# Altium PCB Antenna.PcbDoc
Units mm, origin at the board's own origin, x right, y up, seen from the top; angles counter-clockwise.
Board outline 60.1 x 23.46 mm, 2 copper layers (Top, Bottom); 54 components, 59 nets, 240 pads, 121 vias.
Unrouted connection lines stored in the file: 4.
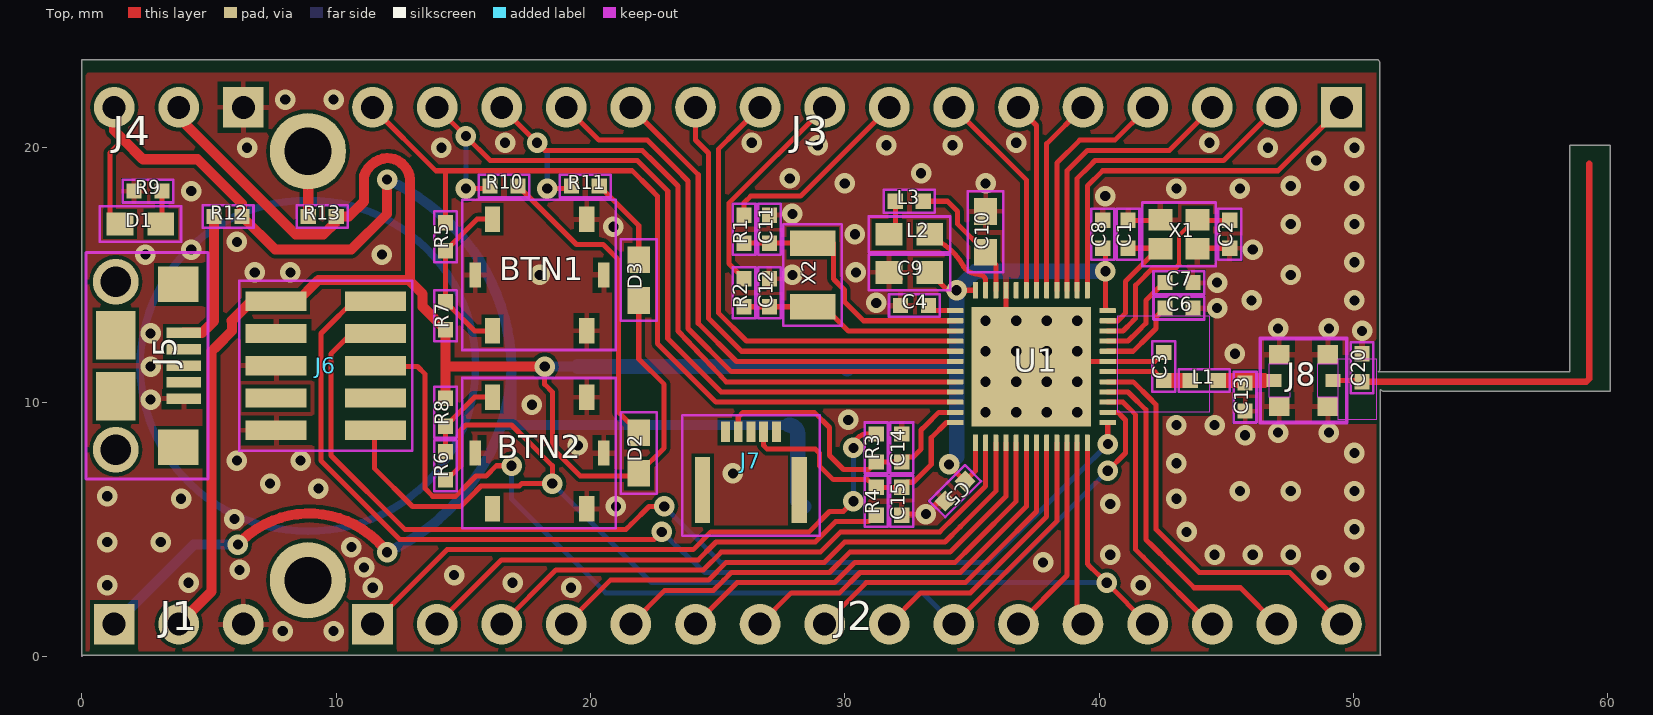
[diagram p0: Top view]
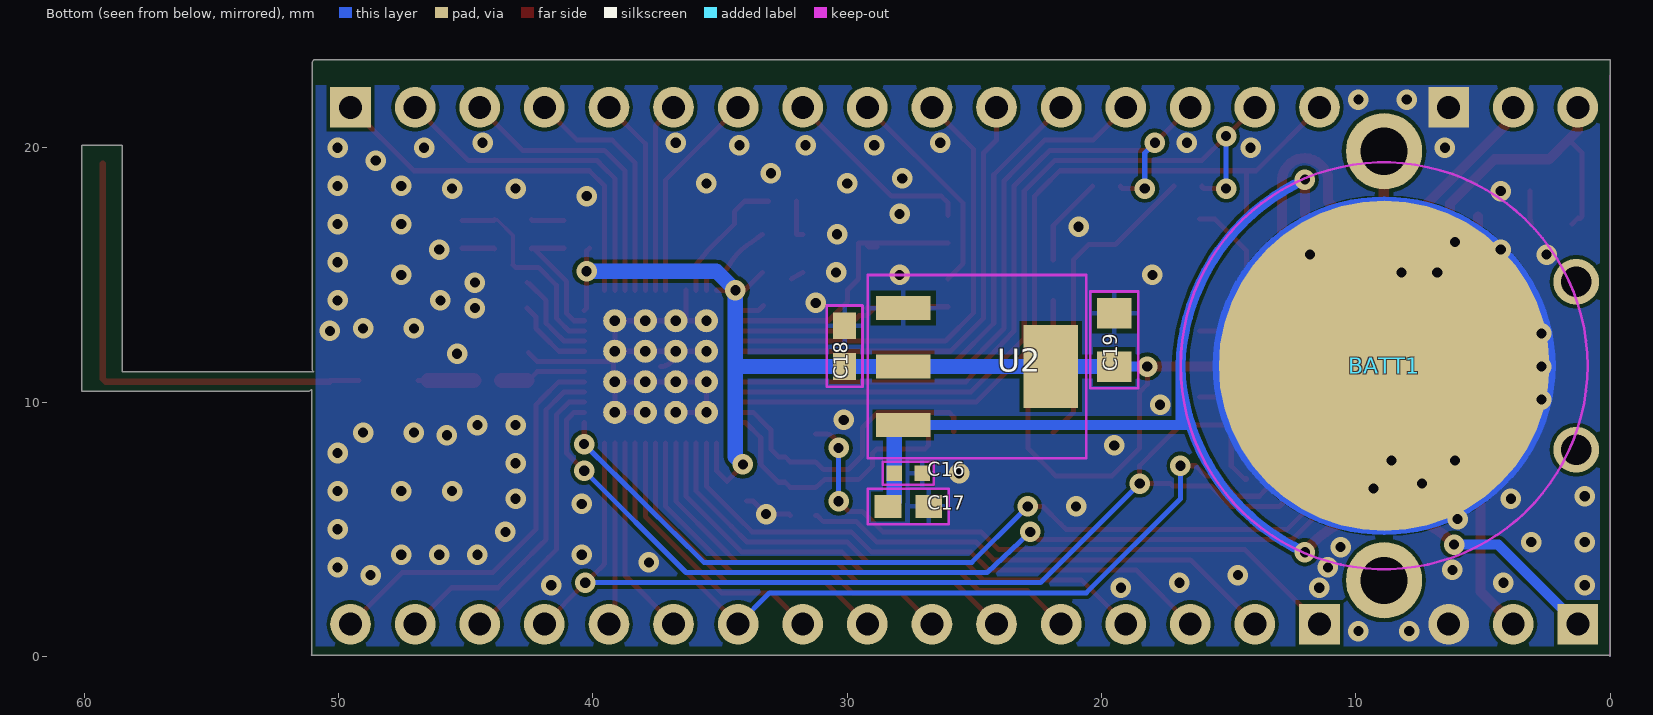
[diagram p1: Bottom view, seen from below]

## Layer stack, top to bottom
Top Solder: solder mask 0.0102, Solder Resist, Dk 3.5
Top: signal copper 0.035
Dielectric 1: dielectric 0.32, FR-4, Dk 4.8
Bottom: signal copper 0.035
Bottom Solder: solder mask 0.0102, Solder Resist, Dk 3.5

## Board outline
0,0 0,23.46 50.965,23.46 51.046,23.378 51.046,11.263 50.987,11.203 58.51,11.203 58.51,20.101 60.097,20.101 60.097,10.435 51.159,10.435 51.059,10.485 51.059,0.069 51.078,0.05 0.05,0.05

## Design rules (kind name [scope] priority, off if disabled: settings)
BoardOutlineClearance mdCopperDimension [All] p1: gap=0.254 ignorepadtopadclearanceinfootprint=FALSE except(0: Arc-SplitContinuation Track-SplitContinuation SMDPad-SplitContinuation THPad-SplitContinuation Via-SplitContinuation Fill-SplitContinuation Poly-SplitContinuation Region-SplitContinuation Text-SplitContinuation; 0.4: Poly-OutlineEdge Poly-CavityEdge Poly-CutoutEdge Poly-SplitBarrior)
Clearance "Clearance (Same Net)" [All] p1: gap=0.15 ignorepadtopadclearanceinfootprint=FALSE
Clearance [All] p2: gap=0.15 ignorepadtopadclearanceinfootprint=FALSE
HoleSize [All] p1: absolutevalues=TRUE maxlimit=2540 minlimit=0.4 maxpercent=80.000 minpercent=20.000
HoleToHoleClearance mdDrill [All] p1: gap=0.4 allowstackedmicrovias=TRUE
MinimumSolderMaskSliver [All] p1 off: minsoldermaskwidth=0.254
PasteMaskExpansion Expansion_SMDPaste_OFF [InPadClass('SMDPaste_OFF')] p1: expansion=0
PasteMaskExpansion mlMinCreamFrame [All] p2: expansion=0
PolygonConnect PolygonConnect_For_PolygonThermal_ON_Width78700_Gap78740 [InPolygonClass('PolygonThermal_ON_Width78700_Gap78740') vs Not IsVia] p1: connectstyle=Relief reliefconductorwidth=0.2 reliefentries=4 polygonreliefangle="90 Angle" airgapwidth=0.2
PolygonConnect ThermalVias [IsVia] p2: connectstyle=Direct reliefconductorwidth=0.254 reliefentries=4 polygonreliefangle="90 Angle" airgapwidth=0.254
PolygonConnect [All] p3: connectstyle=Relief reliefconductorwidth=0.254 reliefentries=4 polygonreliefangle="90 Angle" airgapwidth=0.254
RoutingVias [All] p1: holewidth=0.4 width=0.806 viastyle="Through Hole" minholewidth=0.4 minwidth=0.806 maxholewidth=2.54 maxwidth=2.54
SolderMaskExpansion Expansion_SMDSolder_OFF [InPadClass('SMDSolder_OFF')] p1: expansion=0 istentingtop=FALSE
SolderMaskExpansion mlMinStopFrame [All] p2: expansion=0.1 istentingtop=FALSE
Width [All] p1: maxlimit=0.254 minlimit=0.15 preferedwidth=0.15
26 further rules are at their usual default settings.

## Classes and differential pairs
polygon class PolygonThermal_ON_Width78700_Gap78740: Polygon_1_Net_GND Polygon_2_Net_GND

## Components (designator, comment, footprint, x,y, rotation, side; value= is the part's Value field where it differs from the comment)
BATT1 "" CR1632_HOLDER_TH 8.89,11.43 r270 bottom
BTN1 "PANASONIC_EVQPT5A15" PANASONIC_EVQPT5A15 18,15 r0 top
BTN2 "PANASONIC_EVQPT5A15" PANASONIC_EVQPT5A15 18,8 r0 top
C1 "12pF" RESC0402_N 41.14,16.6 r90 top
C2 "12pF" RESC0402_N 45.14,16.6 r270 top
C3 "0.8pF" RESC0402_N 42.54,11.4 r90 top
C4 "100nF" RESC0402_N 32.74,13.8 r180 top
C5 "100nF" RESC0402_N 34.34,6.5 r225 top
C6 "N.M." RESC0402_N 43.14,13.7 r0 top
C7 "100nF" RESC0402_N 43.14,14.7 r0 top
C8 "100nF" RESC0402_N 40.14,16.6 r90 top
C9 "4.7µF" RESC0603_N 32.54,15.1 r180 top
C10 "1.0µF" RESC0603_N 35.54,16.7 r90 top
C11 "12pF" RESC0402_N 27.04,16.8 r270 top
C12 "12pF" RESC0402_N 27.04,14.3 r270 top
C13 "N.C." RESC0402_N 45.74,10.2 r270 top
C14 "300pF" RESC0402_N 32.24,8.2 r270 top
C15 "300pF" RESC0402_N 32.24,6.1 r270 top
C16 "100nF" RESC0402_N 27.6,7.2 r180 bottom
C17 "10µF" RESC0603_N 27.6,5.9 r180 bottom
C18 "10µF" RESC0603_N 30.1,12.2 r90 bottom
C19 "100µF" RESC0805_N 19.5,12.5 r90 bottom
C20 "TBD" RESC0402_N 50.34,11.35 r90 top
D1 "LED" DIOC0603_N 2.3,17 r0 top
D2 "LED" DIOC0603_N 21.9,8 r270 top
D3 "LED" DIOC0603_N 21.9,14.8 r270 top
J1 "" HDRV3W64P254_1X3_762X254X900B_NO_SILK 3.81,1.27 r0 top
J2 "" HDRV16W64P254_1X16_4064X254X900B_NO_SILK 30.48,1.27 r0 top
J3 "" HDRV16W64P254_1X16_4064X254X900B_NO_SILK 30.48,21.59 r180 top
J4 "" HDRV3W64P254_1X3_762X254X900B_NO_SILK 3.81,21.59 r180 top
J5 "MICROUSB" USB-MICRO-B-RA-SMD-PIP 4.01,11.43 r0 top
J6 "" HDRV127P5X2-10_N 9.59,11.43 r270 top
J7 "" FPC_05P-RA-SMD 26.31,7.24 r0 top
J8 "MM8130-2600" MM8130-2600 48.04,10.85 r90 top
L1 "3.9nH" RESC0402_N 44.14,10.85 r0 top
L2 "10µH" RESC0603_N 32.54,16.6 r180 top
L3 "15nH" RESC0402_N 32.54,17.9 r0 top
R1 "0R" RESC0402_N 26.04,16.8 r90 top
R2 "0R" RESC0402_N 26.04,14.3 r270 top
R3 "0R" RESC0402_N 31.24,8.2 r90 top
R4 "0R" RESC0402_N 31.24,6.1 r90 top
R5 "330R" RESC0402_N 14.3,16.5 r270 top
R6 "330R" RESC0402_N 14.3,7.5 r90 top
R7 "100k" RESC0402_N 14.3,13.4 r270 top
R8 "100k" RESC0402_N 14.3,9.6 r90 top
R9 "330R" RESC0402_N 2.6,18.3 r0 top
R10 "330R" RESC0402_N 16.6,18.5 r0 top
R11 "330R" RESC0402_N 19.8,18.5 r0 top
R12 "0R" RESC0402_N 5.75,17.3 r0 top
R13 "0R" RESC0402_N 9.45,17.3 r0 top
U1 "NRF52832" QFN40P600X600X90-48_N 37.34,11.4 r0 top
U2 "TLV1117" SOT220P700-4_N 24.9,11.4 r180 bottom
X1 "32MHz" BT-XTAL_2016_N 43.14,16.6 r180 top
X2 "32.768kHz" XTAL_3215_N 28.74,15 r270 top

## Footprints (in the part's own frame and the unit in brackets; to place one, negate y for a bottom-side part, rotate by r counter-clockwise, add the part's x,y. Pads: shape width x height; smd on the part's side, far side on the other; paste and mask are expansions set on the pad)
BT-XTAL_2016_N [mm] "BT-XTAL_2016_N"
  rect 0.95x0.85 smd: 1(-0.725,-0.575) 2(0.725,-0.575) 3(0.725,0.575) 4(-0.725,0.575)
  Top keep-out lines w0.1: 1.45,1.25 -1.45,1.25 -1.45,-1.25 1.45,-1.25 1.45,1.25
  body extent -1.5,-1.3 1.5,1.3, height 3.81
CR1632_HOLDER_TH [mm] "CR1632_HOLDER_TH"
  rrect100% 13x13 smd: 1(0,0)
  round 3 hole 1.85: 2(-8.435,0) 3(8.435,0)
  Top keep-out circle w0.1: c0,0 r8
  body extent -9.94,-8.06 9.94,8.06, height 3.81
DIOC0603_N [mil] "DIOC0603_N"
  rect 41.34x35.43 smd: 1(-31.5,0) 2(31.5,0)
  Top keep-out lines w3.94: -62.99,-27.56 62.99,-27.56 62.99,27.56 -62.99,27.56 -62.99,-27.56
  body extent -65,-30 65,30, height 150
FPC_05P-RA-SMD [mm] "FPC_05P-RA-SMD"
  rect 0.6x2.6 smd: 0(-1.9,-0.7) 00(1.9,-0.7)
  rect 0.35x0.8 smd: 1(-1,1.6) 2(-0.5,1.6) 3(0,1.6) 4(0.5,1.6) 5(1,1.6)
  Top keep-out lines w0.1: -2.7,-2.5 -2.7,2.25 2.7,2.25 2.7,-2.5 -2.7,-2.5
  body extent -2.75,-2.55 2.75,2.3, height 3.81
HDRV3W64P254_1X3_762X254X900B_NO_SILK [mm] "HDRV3W64P254_1X3_762X254X900B_NO_SILK"
  rect 1.6x1.6 / inner round 1.478 / far side rect 1.6x1.6 hole 0.9: P$1(-2.54,0)
  round 1.6 hole 0.9: P$2(0,0) P$3(2.54,0)
  body extent -3.29,-0.81 3.35,0.81, height 1.27
HDRV16W64P254_1X16_4064X254X900B_NO_SILK [mm] "HDRV16W64P254_1X16_4064X254X900B_NO_SILK"
  rect 1.6x1.6 / inner round 1.478 / far side rect 1.6x1.6 hole 0.9: P$1(-19.05,0)
  round 1.6 hole 0.9: P$2(-16.51,0) P$3(-13.97,0) P$4(-11.43,0) P$5(-8.89,0) P$6(-6.35,0) P$7(-3.81,0) P$8(-1.27,0) P$9(1.27,0) P$10(3.81,0) P$11(6.35,0) P$12(8.89,0) P$13(11.43,0) P$14(13.97,0) P$15(16.51,0) P$16(19.05,0)
  body extent -19.8,-0.81 19.86,0.81, height 1.27
HDRV127P5X2-10_N [mm] "HDRV127P5X2-10_N"
  rect 0.76x2.4 smd: 1(-2.54,-1.95) 2(-2.54,1.95) 3(-1.27,-1.95) 4(-1.27,1.95) 5(0,-1.95) 6(0,1.95) 7(1.27,-1.95) 8(1.27,1.95) 9(2.54,-1.95) 10(2.54,1.95)
  Top keep-out lines w0.1: 3.35,-3.4 3.35,3.4 -3.35,3.4 -3.35,-3.4 3.35,-3.4
  body extent -3.4,-3.45 3.4,3.45, height 3.81
MM8130-2600 [mil] "MM8130-2600"
  rect 29.53x31.5 smd: 1(-40.35,37.4) 2(40.35,37.4) 3(-40.35,-37.4) 4(40.35,-37.4)
  rect 19.69x22.83 smd: IN(0,45.67) OUT(0,-45.67)
  Top keep-out region: -25.59,21.65 -25.59,53.15 25.59,53.15 25.59,21.65
  Top keep-out region: -25.59,-53.15 -25.59,-21.65 25.59,-21.65 25.59,-53.15
  Top keep-out lines w5.91: -64.96,66.93 -64.96,-66.93 64.96,-66.93 64.96,66.93 -64.96,66.93
  body extent -68,-70 68,70, height 150
PANASONIC_EVQPT5A15 [mm] "PANASONIC_EVQPT5A15"
  rect 0.6x1 smd: 1(-1.85,2.2) 2(-1.85,-2.2) 3(1.85,2.2) 4(1.85,-2.2)
  rect 0.45x1 smd: 5(-2.525,0) 6(2.525,0)
  Top keep-out lines w0.1: -3.05,-2.95 -3.05,2.95 3,2.95 3,-2.95 -3.05,-2.95
  body extent -3.1,-3 3.05,3, height 3.81
QFN40P600X600X90-48_N [mm] "QFN40P600X600X90-48_N"
  rrect30% 0.65x0.2 smd: 1(-3,2.2) 2(-3,1.8) 3(-3,1.4) 4(-3,1) 5(-3,0.6) 6(-3,0.2) 7(-3,-0.2) 8(-3,-0.6) 9(-3,-1) 10(-3,-1.4) 11(-3,-1.8) 12(-3,-2.2) 25(3,-2.2) 26(3,-1.8) 27(3,-1.4) 28(3,-1) 29(3,-0.6) 30(3,-0.2) 31(3,0.2) 32(3,0.6) 33(3,1) 34(3,1.4) 35(3,1.8) 36(3,2.2)
  rrect30% 0.2x0.65 smd: 13(-2.2,-3) 14(-1.8,-3) 15(-1.4,-3) 16(-1,-3) 17(-0.6,-3) 18(-0.2,-3) 19(0.2,-3) 20(0.6,-3) 21(1,-3) 22(1.4,-3) 23(1.8,-3) 24(2.2,-3) 37(2.2,3) 38(1.8,3) 39(1.4,3) 40(1,3) 41(0.6,3) 42(0.2,3) 43(-0.2,3) 44(-0.6,3) 45(-1,3) 46(-1.4,3) 47(-1.8,3) 48(-2.2,3)
  rect 4.7x4.7 smd: PAD(0,0)
  round 0.908 hole 0.4: PAD@VIA01(-1.8,1.8) PAD@VIA02(-1.8,0.6) PAD@VIA03(-1.8,-0.6) PAD@VIA04(-1.8,-1.8) PAD@VIA05(-0.6,1.8) PAD@VIA06(-0.6,0.6) PAD@VIA07(-0.6,-0.6) PAD@VIA08(-0.6,-1.8) PAD@VIA09(0.6,1.8) PAD@VIA10(0.6,0.6) PAD@VIA11(0.6,-0.6) PAD@VIA12(0.6,-1.8) PAD@VIA13(1.8,1.8) PAD@VIA14(1.8,0.6) PAD@VIA15(1.8,-0.6) PAD@VIA16(1.8,-1.8)
  body extent -3.33,-3.33 3.33,3.33, height 3.81
RESC0402_N [mm] "RESC0402_N"
  rect 0.6x0.6 smd: 1(-0.55,0) 2(0.55,0)
  Top keep-out lines w0.1: -1,0.45 -1,-0.45 1,-0.45 1,0.45 -1,0.45
  body extent -1.05,-0.5 1.05,0.5, height 3.81
RESC0603_N [mil] "RESC0603_N"
  rect 41.34x35.43 smd: 1(-31.5,0) 2(31.5,0)
  Top keep-out lines w3.94: 62.99,27.56 -62.99,27.56 -62.99,-27.56 62.99,-27.56 62.99,27.56
  body extent -65,-30 65,30, height 150
RESC0805_N [mm] "RESC0805_N"
  rect 1.2x1.35 smd: 1(-1.1,0) 2(1,0)
  Top keep-out lines w0.1: -1.95,-0.95 1.85,-0.95 1.85,0.95 -1.95,0.95 -1.95,-0.95
  body extent -2,-1 1.9,1, height 3.81
SOT220P700-4_N [mm] "SOT220P700-4_N"
  rect 2.15x0.95 smd: 1(-2.9,2.3) 2(-2.9,0) 3(-2.9,-2.3)
  rect 2.15x3.25 smd: 4(2.9,0)
  Top keep-out lines w0.1: 4.3,-3.6 4.3,3.6 -4.3,3.6 -4.3,-3.6 4.3,-3.6
  body extent -4.35,-3.65 4.35,3.65, height 3.81
USB-MICRO-B-RA-SMD-PIP [mm] "USB-MICRO-B-RA-SMD-PIP"
  rect 1.35x0.4 smd: 1(0,1.3) 2(0,0.65) 3(0,0) 4(0,-0.65) 5(0,-1.3)
  rect 1.6x1.4 smd: 6(-0.225,3.2) 7(-0.225,-3.2)
  rect 1.55x1.9 smd: 8(-2.675,1.2) 9(-2.675,-1.2)
  round 1.8 hole 1.2: 10(-2.675,3.3) 11(-2.675,-3.3)
  Top keep-out lines w0.127: -3.85,-4.45 0.95,-4.45 0.95,4.45 -3.85,4.45 -3.85,-4.45
  body extent -3.92,-4.52 1.02,4.52, height 3.81
XTAL_3215_N [mm] "XTAL_3215_N"
  rect 1x1.8 smd: 1(-1.25,0) 2(1.25,0)
  Top keep-out lines w0.1: 2,-1.15 -2,-1.15 -2,1.15 2,1.15 2,-1.15
  body extent -2.05,-1.2 2.05,1.2, height 3.81

## Part data
BATT1: library part CR1632_HOLDER_TH, PackageName=CR1632_HOLDER_TH
C1 C2 C3 C4 C5 C6 C7 C8 C11 C12 C13 C14 C15 C16 C20 L1 L3 R1 R2 R3 R4 R5 R6 R7 R8 R9 R10 R11 R12 R13: library part RESC0402_N, PackageName=RESC0402_N
C9 C10 C17 C18 L2: library part RESC0603_N, PackageName=RESC0603_N
C19: library part RESC0805_N, PackageName=RESC0805_N
D1 D2 D3: library part DIOC0603_N, PackageName=DIOC0603_N
J1 J4: library part HDRV3W64P254_1X3_762X254X900B_NO_SILK, PackageName=HDRV3W64P254_1X3_762X254X900B_NO_SILK
J2 J3: library part HDRV16W64P254_1X16_4064X254X900B_NO_SILK, PackageName=HDRV16W64P254_1X16_4064X254X900B_NO_SILK
J5: library part USB-MICRO-B-RA-SMD-PIP, PackageName=USB-MICRO-B-RA-SMD-PIP
J6: library part HDRV127P5X2-10_N, PackageName=HDRV127P5X2-10_N
J7: library part FPC_05P-RA-SMD, PackageName=FPC_05P-RA-SMD
U1: library part QFN40P600X600X90-48_N, PackageName=QFN40P600X600X90-48_N
U2: library part SOT220P700-4_N, PackageName=SOT220P700-4_N
X1: library part BT-XTAL_2016_N, PackageName=BT-XTAL_2016_N
X2: library part XTAL_3215_N, PackageName=XTAL_3215_N
BTN1 BTN2: PackageName=PANASONIC_EVQPT5A15
J8: PackageName=MM8130-2600

## Via types
v1: diameter 0.806/0.806 (per signal layer), hole 0.4, Top to Bottom, 121 vias

## Nets (pads, with @x,y where several pads share a name; then routed paths per layer and width w, separated by ;. In a path a pad name is that pad's centre, name@x,y a point inside that pad or via, vN(x,y) a via of type N, cw(c..) or ccw(c..) an arc to the next point about the centre after c; other vN are vias at no path point)
ANT: C3.1 L1.1 U1.30 | length 3.4
  Top w0.2: U1.30@40.34,11.2 42.19,11.2 C3.1 C3.1@42.59,10.85
  Top w0.6: C3.1@42.59,10.85 L1.1@43.59,10.85
DEC1: C4.1 U1.1 | length 1.1
  Top w0.2: C4.1 33.49,13.6 U1.1
DEC2: C6.1 U1.32 | length 3.2
  Top w0.2: U1.32 41.34,12 41.94,12.6 42.24,12.9 42.24,13.1 42.24,13.35 C6.1
DEC3: C7.1 U1.33 | length 3.7
  Top w0.2: U1.33 41.14,12.4 41.54,12.8 41.84,13.1 41.84,14 42.49,14.65 C7.1
DEC4: C10.1 L3.2 U1.46 | length 5.2
  Top w0.2: L3.2 34.04,17.9 34.44,17.5 34.44,17 C10.1 35.94,15.4 U1.46
GND: BATT1.1 BTN1.3 BTN1.4 BTN1.5 BTN1.6 BTN2.3 BTN2.4 BTN2.5 BTN2.6 C1.2 C2.2 C3.2 C4.2 C5.2 C6.2 C7.2 C8.2 C9.2 C10.2 C11.1 C12.1 C13.2 C14.1 C15.2 C16.2 C17.2 C18.2 C19.2 C20.2 J1.P$3 J4.P$1 J5.5 J6.3 J6.5 J6.9 J8.1 J8.2 J8.3 J8.4 R9.1 U1.31 U1.45 U1.PAD U1.PAD@VIA01 U1.PAD@VIA02 U1.PAD@VIA03 U1.PAD@VIA04 U1.PAD@VIA05 U1.PAD@VIA06 U1.PAD@VIA07 U1.PAD@VIA08 U1.PAD@VIA09 U1.PAD@VIA10 U1.PAD@VIA11 U1.PAD@VIA12 U1.PAD@VIA13 U1.PAD@VIA14 U1.PAD@VIA15 U1.PAD@VIA16 U2.1 X1.2 X1.4 | length 70.4
  Top w0.2: C9.2 C9.2@32.19,14.85 ; C15.2 32.29,5.6 v1(33.19,5.6) 33.701,6.111 C5.2 ; U1.PAD@35.54,12 U1.PAD@36.74,12 ; U1.PAD@35.54,13.2 U1.PAD@36.34,13.2 ; U1.45 U1.PAD@36.34,13.2 ; U1.PAD@36.39,13.39 ccw(c36.66,13.47) U1.PAD@36.74,13.2 ; U1.PAD@36.74,9.6 35.54,9.6 35.54,10.8 36.74,10.8 37.94,10.8 U1.PAD@39.14,10.8 ; U1.PAD cw(c37.34,12) U1.PAD@36.74,12 ; U1.PAD@37.94,9.6 39.14,9.6 U1.PAD@39.14,10.8 ; C1.2 42.39,17.15 X1.2 ; C3.2 42.19,11.6 U1.31 U1.PAD@39.19,11.59 ; X1.4 43.89,16.05 C2.2 ; U1.PAD@36.34,13.2 U1.PAD@36.74,13.2 ; U1.PAD@36.74,12 37.94,12 U1.PAD@39.14,12 ; U1.PAD@36.74,13.2 37.94,13.2 39.14,13.2 U1.PAD@39.14,12 ; U1.PAD@39.14,10.8 ccw(c38.97,11.02) 39.19,11.19 U1.PAD@39.19,11.59 ; U1.PAD@39.14,12 ccw(c39.37,11.82) U1.PAD@39.19,11.59
  Bottom w0.3: 2.286,11.43 cw(c8.84,11.38) 8.89,17.934 cw(c8.94,11.38) 15.494,11.43 cw(c8.94,11.48) 8.89,4.926 cw(c8.84,11.48) 2.286,11.43
  other v1: 7.9,1 9.9,1 11.44,2.7 19.24,2.7 1,2.8 41.64,2.8 4.2,2.9 16.94,2.9 14.64,3.2 48.74,3.2 6.2,3.4 11.1,3.5 50.04,3.5 37.8,3.7 40.44,4 44.54,4 46.04,4 47.54,4 10.6,4.3 1,4.5 3.1,4.5 43.44,4.9 50.04,5 6,5.4 21,5.9 40.44,6 3.9,6.2 43.04,6.2 1,6.3 45.54,6.5 47.54,6.5 50.04,6.5 9.3,6.6 7.4,6.8 25.6,7.2 43.04,7.6 6.1,7.7 8.6,7.7 50.04,8 19.5,8.3 45.74,8.7 47.04,8.8 49.04,8.8 43.04,9.1 44.54,9.1 30.14,9.3 17.7,9.9 2.7,10.1 2.7,11.4 45.34,11.9 2.7,12.7 50.34,12.8 47.04,12.9 49.04,12.9 44.64,13.7 31.24,13.9 46,14 50.04,14 44.64,14.7 18,15 27.94,15 47.54,15 6.8,15.1 8.2,15.1 30.44,15.1 50.04,15.5 2.5,15.8 11.8,15.8 4.3,16 46.04,16 6.1,16.3 30.4,16.6 20.9,16.9 47.54,17 50.04,17 27.94,17.4 40.24,18.1 4.3,18.3 43.04,18.4 45.54,18.4 47.54,18.5 50.04,18.5 30,18.6 35.54,18.6 27.84,18.8 33,19 48.54,19.5 6.5,20 14.14,20 46.64,20 50.04,20 28.94,20.1 31.64,20.1 34.24,20.1 16.64,20.2 26.34,20.2 36.74,20.2 44.34,20.2 8,21.9 9.9,21.9
N$1: C20.1 J8.OUT | length 18.6
  Top w0.2: J8.OUT C20.1@50.34,10.85
  Top w0.254: C20.1 55.511,10.8 59.157,10.8 59.275,10.918 59.275,19.373
N$2: L2.2 L3.1 | length 1.5
  Top w0.2: L2.2 31.99,16.6 L3.1
N$3: C1.1 U1.35 X1.3 | length 5.2
  Top w0.2: U1.35 40.74,13.2 41.04,13.5 41.04,14.75 X1.3@42.34,16.05 ; C1.1 X1.3@42.34,16.05 ; X1.3 42.415,16.05 X1.3@42.34,16.05
N$4: L2.1 U1.47 | length 3.3
  Top w0.2: L2.1 33.74,16.3 cw(c32.446,14.106) 34.64,15.4 ccw(c35.15,15.61) 34.94,15.1 ccw(c35.48,16.411) 35.34,15 cw(c35.318,14.778) 35.54,14.8 U1.47
N$5: C13.1 J8.IN L1.2 | length 2.3
  Top w0.2: C13.1 C13.1@45.74,10.85 ; 46.49,10.85 J8.IN
  Top w0.6: L1.2 45.74,10.85 46.49,10.85
N$6: BTN2.1 R6.2 R8.1 | length 3.3
  Top w0.2: R6.2 R8.1 15.45,10.2 BTN2.1
N$7: BTN1.1 BTN1.2 R5.2 R7.1 | length 6.7
  Top w0.2: BTN1.2 15.45,12.8 R7.1 R5.2 15.55,17.2 BTN1.1
N$8: D2.1 R10.2 | length 12.3
  Top w0.2: R10.2 19.45,16.2 20.3,16.2 20.5,16.2 21.1,15.6 21.1,15.1 21.1,9.6 D2.1
N$9: D3.1 R11.2 | length 3.5
  Top w0.2: R11.2 21.9,16.95 D3.1
NFC1: C14.2 J7.2 R3.1 U1.11 | length 12.1
  Top w0.2: J7.2 25.81,9.41 26,9.6 28.8,9.6 29.4,9 29.4,8.4 29.4,7.9 29.95,7.35 30.94,7.35 R3.1 C14.2 32.44,7.85 32.7,7.85 33,8.15 33,8.9 33.2,9.1 33.7,9.6 U1.11
NFC2: C15.1 J7.4 R4.2 U1.12 | length 10.9
  Top w0.2: J7.4@26.81,8.69 J7.4 26.8,8.83 26.8,8.3 26.95,8.15 28.85,8.15 29,8 29,7.5 29.55,6.95 29.75,6.95 29.85,6.95 30.89,6.95 R4.2 C15.1 32.44,6.85 32.7,6.85 33.4,7.55 33.4,8.6 34,9.2 U1.12
P0.00: J3.P$8 R1.2 | length 7.8
  Top w0.2: R1.2 26.04,17.84 26.1,17.9 26.3,18.1 26.54,18.1 28.26,18.1 J3.P$8
P0.01: J3.P$9 R2.1 | length 8.6
  Top w0.2: R2.1 25.44,15.45 25.44,17.7 25.44,17.82 J3.P$9
P0.02: J3.P$10 U1.4 | length 18.5
  Top w0.2: J3.P$10 25.74,20.66 25.04,19.96 25.04,13.5 26.14,12.4 26.64,12.4 U1.4
P0.03: J3.P$11 U1.5 | length 18.7
  Top w0.2: J3.P$11 24.13,20.31 24.64,19.8 24.64,13.3 25.94,12 26.04,12 26.44,12 U1.5
P0.04: J3.P$12 U1.6 | length 20.3
  Top w0.2: J3.P$12 24.24,18.94 24.24,13.1 25.74,11.6 26.24,11.6 U1.6
P0.05: J3.P$13 U1.7 | length 23
  Top w0.2: J3.P$13 20.34,20.3 21.04,20.3 22.24,20.3 23.34,19.2 23.84,18.7 23.84,12.9 25.54,11.2 26.04,11.2 U1.7@34.34,11.2
P0.06: J3.P$14 R11.1 U1.8 | length 28.9
  Top w0.2: J3.P$14 v1(17.9,20.2) ; v1(18.3,18.4) 19.15,18.4 ccw(c19.15,18.5) R11.1@19.25,18.5 ; U1.8 25.84,10.8 25.34,10.8 23.44,12.8 23.44,18.5 22.54,19.4 22.04,19.9 20.14,19.9 18.2,19.9 v1@18.05,20.05 ; v1(17.9,20.2) v1@18.05,20.05 ; v1(17.9,20.2) v1@18.05,20.05
  Bottom w0.2: v1(17.9,20.2) 18.3,19.8 v1(18.3,18.4)
P0.07: J3.P$15 R10.1 U1.9 | length 33.5
  Top w0.2: J3.P$15 v1(15.1,20.46) 16.06,19.5 20.24,19.5 21.84,19.5 22.44,18.9 23.04,18.3 23.04,12.5 25.14,10.4 25.64,10.4 U1.9 ; v1(15.1,18.4) 15.95,18.4 ccw(c15.95,18.5) R10.1
  Bottom w0.2: v1(15.1,18.4) v1(15.1,20.46) v1(15.1,18.4)
P0.08: J3.P$16 R5.1 U1.10 | length 33.2
  Top w0.2: J3.P$16 13.92,19.1 14.3,19.1 ; R5.1 14.3,19.1 ; U1.10 25.44,10 24.94,10 22.64,12.3 22.64,18.1 22.34,18.4 21.64,19.1 20.44,19.1 14.3,19.1
P0.09: J2.P$1 R3.2 | length 24.2
  Top w0.2: J2.P$1 14.36,4.2 23.04,4.2 24.04,4.2 24.74,4.9 28.6,4.9 29.4,5.7 29.44,5.7 29.94,5.7 v1(30.34,6.1) ; v1(30.34,8.2) cw(c30.89,8.2) 30.89,8.75 R3.2
  Bottom w0.2: v1(30.34,6.1) v1(30.34,8.2)
P0.10: J2.P$2 R4.1 | length 19
  Top w0.2: J2.P$2 16.5,3.8 23.24,3.8 24.24,3.8 24.84,4.4 24.94,4.5 26.6,4.5 28.84,4.5 29.64,5.3 30.94,5.3 31.19,5.55 R4.1
P0.11: J2.P$3 U1.14 | length 23
  Top w0.2: J2.P$3 18.64,3.4 23.44,3.4 24.44,3.4 25.14,4.1 29.04,4.1 29.84,4.9 33.74,4.9 34.34,5.5 35.54,6.7 U1.14
P0.12: J2.P$4 U1.15 | length 21
  Top w0.2: J2.P$4 20.78,3 23.44,3 24.64,3 25.34,3.7 29.2,3.7 30,4.5 33.94,4.5 34.54,5.1 35.94,6.5 U1.15
P0.13: J2.P$5 U1.16 | length 18.9
  Top w0.2: J2.P$5 22.92,2.6 23.64,2.6 24.84,2.6 25.24,3 25.54,3.3 29.4,3.3 30.2,4.1 30.34,4.1 32.44,4.1 34.14,4.1 35.44,5.4 36.34,6.3 U1.16
P0.14: J2.P$6 U1.17 | length 16.9
  Top w0.2: J2.P$6 25.76,2.9 28.4,2.9 29.6,2.9 29.9,3.2 30.4,3.7 31.56,3.7 34.34,3.7 35.04,4.4 36.74,6.1 U1.17
P0.15: J2.P$7 U1.18 | length 14.9
  Top w0.2: J2.P$7 27.9,2.5 29.8,2.5 30.6,3.3 31.7,3.3 34.54,3.3 37.14,5.9 U1.18
P0.16: J2.P$8 U1.19 | length 12.9
  Top w0.2: J2.P$8 30.84,2.9 34.74,2.9 35.94,4.1 37.54,5.7 U1.19
P0.17: J2.P$9 U1.20 | length 10.8
  Top w0.2: J2.P$9 32.98,2.5 33.64,2.5 34.94,2.5 35.34,2.9 37.94,5.5 U1.20
P0.18/SWO: J2.P$10 J6.6 U1.21 | length 40.2
  Top w0.2: J6.6 11.57,11.4 13.2,11.4 13.5,11.1 13.5,10.5 13.5,6.6 13.8,6.3 14.7,6.3 15.2,6.8 15.5,7.1 15.9,7.1 16.3,7.5 v1(16.9,7.5) ; J2.P$10 38.34,5.32 U1.21
  Bottom w0.2: v1(16.9,7.5) 16.9,6.2 20.6,2.5 21.2,2.5 29.5,2.5 33.06,2.5 J2.P$10
P0.19: J2.P$11 U1.22 | length 7.9
  Top w0.2: J2.P$11 38.74,3.18 U1.22
P0.20: J2.P$12 U1.23 | length 7.2
  Top w0.2: U1.23@39.14,8.4 39.14,1.5 J2.P$12
P0.21/RESET: J2.P$13 J6.10 R6.1 U1.24 | length 49.5
  Top w0.2: J6.10 11.5,8.85 11.5,7.4 13,5.9 14.2,5.9 14.9,5.9 15.3,6.3 15.7,6.7 15.8,6.7 17.2,6.7 17.3,6.8 v1(18.5,6.8) 18.5,7.5 17.7,8.3 16.9,9.1 16.6,9.1 15.1,9.1 14.9,8.9 14.9,8.3 14.9,7.5 14.35,6.95 R6.1 14.3,7 R6.1@14.4,7 ; U1.24 39.54,3.64 39.58,3.6 ; J2.P$13 v1(40.3,2.9) ; 39.58,3.6 v1(40.3,2.9) ; 39.58,3.6 v1(40.3,2.9)
  Bottom w0.2: v1(18.5,6.8) 22.4,2.9 22.5,2.9 28.6,2.9 37.2,2.9 v1(40.3,2.9)
P0.22: J2.P$14 U1.27 | length 10.9
  Top w0.2: U1.27 40.94,10 41.44,9.5 41.44,4.2 41.74,3.9 44.44,1.2 44.44,1.26 J2.P$14
P0.23: J2.P$15 U1.28 | length 13.4
  Top w0.2: U1.28 41.14,10.4 41.24,10.3 41.84,9.7 41.84,4.6 42.14,4.3 42.74,3.7 43.74,2.7 44.04,2.7 45.56,2.7 J2.P$15
P0.24: J2.P$16 U1.29 | length 16
  Top w0.2: U1.29 41.34,10.8 42.04,10.1 42.14,10 42.24,9.9 42.24,5 42.54,4.7 43.94,3.3 47.5,3.3 J2.P$16
P0.25: J3.P$1 U1.37 | length 15.4
  Top w0.2: U1.37 39.54,18.5 40.14,19.1 47.04,19.1 J3.P$1
P0.26: J3.P$2 U1.38 | length 13.4
  Top w0.2: U1.38@39.14,14.4 39.14,18.8 39.64,19.3 39.84,19.5 41.24,19.5 44.9,19.5 J3.P$2
P0.27: J3.P$3 U1.39 | length 11.4
  Top w0.2: U1.39 38.74,19.1 39.54,19.9 40.44,19.9 42.76,19.9 J3.P$3
P0.28: J3.P$4 U1.40 | length 9.5
  Top w0.2: U1.40 38.34,19.4 39.24,20.3 40.62,20.3 J3.P$4
P0.29: J3.P$5 U1.41 | length 7.8
  Top w0.2: U1.41 37.94,20.16 J3.P$5
P0.30: J3.P$6 U1.42 | length 7.5
  Top w0.2: J3.P$6 37.54,20.88 U1.42
P0.31: J3.P$7 U1.43 | length 8.4
  Top w0.2: J3.P$7 37.14,18.74 U1.43
SWDCLK: J6.4 U1.25 | length 41.9
  Top w0.2: J6.4 11.44,12.6 10.5,12.6 9.8,11.9 9.8,7.9 12.7,5 21.4,5 21.6,5.2 22.3,5.9 v1(22.9,5.9) ; U1.25 40.34,8.36 v1(40.35,8.35)
  Bottom w0.2: v1(22.9,5.9) 23.2,5.6 25.1,3.7 34.7,3.7 35.64,3.7 v1(40.35,8.35)
SWDIO: J6.2 U1.26 | length 45.4
  Top w0.2: J6.2 10.67,13.97 9.6,12.9 9.5,12.8 9.4,12.7 9.4,7.7 12.5,4.6 22.3,4.6 22.5,4.6 v1(22.8,4.9) ; v1(40.34,7.3) 41.04,8 41.04,9.3 40.94,9.4 40.74,9.6 U1.26
  Bottom w0.2: v1(22.8,4.9) 22.9,4.8 24.5,3.3 35.64,3.3 36.34,3.3 v1(40.34,7.3)
VCC_P5V0_USB: J5.1 R12.1 | length 5.5
  Top w0.4: J5.1 4.73,12.73 5.2,13.2 R12.1
VDD_LED: D1.2 R9.2 | length 1.3
  Top w0.2: D1.2 3.15,17.25 R9.2
VDD_P3V3: C5.1 C8.1 C9.1 C18.1 C19.1 D2.2 D3.2 J1.P$2 J4.P$2 J6.1 R7.2 R8.2 R13.2 U1.13 U1.36 U1.48 U2.2 U2.4 | length 104.6
  Top w0.2: J6.1 7.71,13.9 J6.1@8.4,13.9 ; R8.2 14.3,11.4 ; v1(18.2,11.4) 18.2,10.7 18.5,10.4 18.5,9 18.5,8.2 19.6,7.1 21.8,7.1 D2.2 22.9,8.2 22.9,10.7 21.9,11.7 D3.2 ; C9.1 v1@34.04,14.4 ; v1(34.1,7.55) 34.1,7.518 C5.1 35.14,7.3 U1.13 ; U1.48 v1(34.4,14.4) ; C8.1 40.25,15.94 v1(40.25,15.15) 40.25,13.69 U1.36 ; v1@34.04,14.4 v1(34.4,14.4) ; v1@34.04,14.4 v1(34.4,14.4)
  Top w0.4: J4.P$2@3.81,21.19 8.4,16.6 9,16.6 9.5,16.6 ; 5.1,2.56 5.1,12 5.3,12.2 5.9,12.8 5.9,13.2 ; J6.1@8.4,13.9 9.3,14.8 11.8,14.8 12.85,14.8 ; R8.2 R7.2 13.4,13.75 13.4,14.25 12.85,14.8 ; 14.3,11.4 v1(18.2,11.4) ; 9.5,16.6 R13.2@10,17.1 ; 9.5,16.6 9.7,16.8 R13.2@10,17.1 ; R13.2@10,17.1 R13.2 ; R13.2@10,17.1 R13.2 ; R13.2 10.5,17.3 11.1,17.9 11.1,18.9 cw(c12.096,18.549) 12,19.6 cw(c11.997,18.693) 12.9,18.6 12.9,14.85 12.85,14.8
  Top w0.406: J1.P$2 5.1,2.56 ; J4.P$2@3.81,21.19 J4.P$2 ; 5.9,13.2 6.6,13.9 7.57,13.9 J6.1
  Bottom w0.4: v1(18.2,11.4) C19.1
  Bottom w0.6: C19.1 22,11.4 U2.2 C18.1 ; v1(34.1,7.55) 34.4,7.85 34.4,11.3 ; 34.4,11.4 v1(34.4,14.4) ; v1(40.25,15.15) 35.15,15.15 v1(34.4,14.4) ; C18.1 34.3,11.4 34.4,11.3 ; C18.1 30.1,11.3 C18.1 ; 34.4,11.3 v1(34.4,14.4)
VDD_P3V3_BATT: BATT1.2 R13.1 | length 2.6
  Top w0.4: BATT1.2 8.9,19.855 R13.1
VDD_P5V0: C16.1 C17.1 D1.1 J1.P$1 J4.P$3 R12.2 U2.3 | length 69
  Top w0.2: D1.1@1.5,17 1.27,17.23 1.17,17.23 1.1,17.3 1.1,19.8 1.625,20.325
  Top w0.4: 1.27,20.68 1.625,20.325 2.4,19.55 4.55,19.55 6.3,17.8 ; v1(6.138,4.4) cw(c8.943,1.791) v1(12,4.1) ; v1(12,18.75) 12,17.4 10.6,16 9.6,16 7.6,16 R12.2 ; R12.2 6.3,17.8 ; R12.2 6.3,17.8
  Top w0.406: 1.27,20.68 J4.P$3
  Bottom w0.4: v1(12,4.1) ccw(c8.609,11.671) 16.9,11.4 ; v1(12,18.75) cw(c8.569,11.154) 16.9,11.4 ; U2.3 19.15,9.1 16.51,9.1 16.51,9.144 16.9,9.144 16.9,11.4
  Bottom w0.406: J1.P$1 4.4,4.4 v1(6.138,4.4)
  Bottom w0.6: U2.3 cw(c27.8,8.75) 28.15,8.75 C16.1 28.15,6.15 ccw(c28.4,6.15) C17.1
X1: C2.1 U1.34 X1.1 | length 8.1
  Top w0.15: 43.14,15.4 43.14,16.55 43.765,17.175 X1.1
  Top w0.2: U1.34 40.94,12.8 41.34,13.2 41.44,13.3 41.44,14.1 41.44,14.6 42.14,15.3 43.04,15.3 43.14,15.4 ; X1.1 43.89,17.15 C2.1
XL1: C11.2 R1.1 U1.2 X2.1 | length 11.2
  Top w0.2: R1.1 C11.2 X2.1 X2.1@28.84,16.25 ; X2.1@29.24,16.2 29.14,16.1 28.84,16.1 X2.1@28.84,16.25 ; U1.2 30.74,13.2 29.99,13.95 29.99,14.41 29.6,14.8 29.55,14.85 29.55,15.7 29.55,16.25 29.29,16.25 X2.1@28.84,16.25
XL2: C12.2 R2.2 U1.3 X2.2 | length 9
  Top w0.2: R2.2 C12.2 X2.2 28.79,13.7 X2.2@28.94,13.7 ; X2.2@29.24,13.7 X2.2@28.94,13.7 ; U1.3 30.14,12.8 29.54,13.4 29.24,13.4 29.04,13.6 X2.2@28.94,13.7
pads on no net: BATT1.3 BTN2.2 J5.2 J5.3 J5.4 J5.6 J5.7 J5.8 J5.9 J5.10 J5.11 J6.7 J6.8 J7.00 J7.0 J7.1 J7.3 J7.5 U1.44

## Polygon pours and split planes (outlines as drawn)
GND on Bottom "Polygon_1_Net_GND" (solid, remove dead copper, pour order 1): -0.1,-0.1 -0.1,22.96 50.9,22.96 50.9,-0.1
GND on Top "Polygon_2_Net_GND" (solid, remove dead copper, pour order 0): -0.1,-0.1 -0.1,22.96 50.9,22.96 50.9,-0.1

## Keep-outs
Top:
  region: 49.4,9.3 49.4,11.7 50.9,11.7 50.9,9.3
  region: 40.74,9.6 40.74,13.4 44.34,13.4 44.34,9.6
Keep-Out Layer:
  lines w0: 0,0 0,22.86

## Silkscreen, mask and mechanical layers (free items; w line width, h text height)
Dimension:
  lines w0: 0,0 0,22.86
  lines w0.508: 51.074,10.469 51.059,10.485 51.059,0.069 51.078,0.05 0.05,0.05 0,0 0,23.46 50.965,23.46 51.046,23.378 51.046,11.263 50.987,11.203 55.133,11.203 58.51,11.203 58.51,20.101 60.097,20.101 60.097,10.435 51.159,10.435
tPlace:
  lines w0.2: 10.16,1.27 10.16,1.746 ; 10.16,21.114 10.16,21.59 ; 10.636,2.381 15.24,2.381 15.24,1.27 ; 10.636,20.479 17.78,20.479 17.78,21.59 ; 27.94,21.59 27.94,20.479 33.02,20.479 33.02,21.59 ; 40.64,1.111 40.64,2.381 43.18,2.381 43.18,1.27
  text "4" at 16.807,19.754 h0.85 r90
  text "5" at 19.347,19.754 h0.85 r90
  text "01" at 29.507,19.187 h0.85 r90
  text "31" at 34.587,19.187 h0.85 r90
  text "08" at 11.727,18.904 h0.85 r90
  text "07" at 14.267,18.904 h0.85 r90
  text "04" at 21.887,18.904 h0.85 r90
  text "03" at 24.427,18.904 h0.85 r90
  text "02" at 26.967,18.904 h0.85 r90
  text "00" at 32.047,18.904 h0.85 r90
  text "30" at 37.127,18.904 h0.85 r90
  text "29" at 39.667,18.904 h0.85 r90
  text "28" at 42.207,18.904 h0.85 r90
  text "27" at 44.747,18.904 h0.85 r90
  text "26" at 47.287,18.904 h0.85 r90
  text "25" at 49.827,18.904 h0.85 r90
  text "PWR" at 1,18.848 h0.85
  text "LED1" at 23.642,13.5 h0.68 r90
  text "J8" at 47,12.548 h0.85
  text "BTN1" at 21.4,11.948 h0.85
  text "J7" at 27.2,10.648 h0.85
  text "RESET" at 21.4,9.948 h0.85
  text "NFCT" at 26.3,9.348 h0.85
  text "nRF52832" at 41.952,7.9 h0.85 r90
  text "LED2" at 23.442,6.5 h0.68 r90
  text "J5" at 1.7,5.648 h0.85
  text "J6" at 8.7,5.148 h0.85
  text "5V0" at 1.802,2.54 h0.85 r90
  text "3V3" at 4.362,2.54 h0.85 r90
  text "GND" at 6.922,2.54 h0.85 r90
  text "09" at 11.982,2.54 h0.85 r90
  text "10" at 14.522,2.54 h0.85 r90
  text "11" at 17.062,2.54 h0.85 r90
  text "12" at 19.602,2.54 h0.85 r90
  text "13" at 22.142,2.54 h0.85 r90
  text "14" at 24.682,2.54 h0.85 r90
  text "15" at 27.222,2.54 h0.85 r90
  text "16" at 29.762,2.54 h0.85 r90
  text "17" at 32.302,2.54 h0.85 r90
  text "18" at 34.842,2.54 h0.85 r90
  text "19" at 37.382,2.54 h0.85 r90
  text "20" at 39.922,2.54 h0.85 r90
  text "21" at 42.462,2.54 h0.85 r90
  text "22" at 45.002,2.54 h0.85 r90
  text "23" at 47.542,2.54 h0.85 r90
  text "24" at 50.082,2.54 h0.85 r90
bPlace:
  text "01" at 28.913,19.187 h0.85 r270
  text "31" at 33.993,19.187 h0.85 r270
  text "08" at 11.133,18.904 h0.85 r270
  text "07" at 13.673,18.904 h0.85 r270
  text "06" at 16.213,18.904 h0.85 r270
  text "05" at 18.753,18.904 h0.85 r270
  text "04" at 21.293,18.904 h0.85 r270
  text "03" at 23.833,18.904 h0.85 r270
  text "02" at 26.373,18.904 h0.85 r270
  text "00" at 31.453,18.904 h0.85 r270
  text "30" at 36.533,18.904 h0.85 r270
  text "29" at 39.073,18.904 h0.85 r270
  text "28" at 41.613,18.904 h0.85 r270
  text "27" at 44.153,18.904 h0.85 r270
  text "26" at 46.693,18.904 h0.85 r270
  text "25" at 49.233,18.904 h0.85 r270
  text "GND" at 6.033,18.194 h0.85 r270
  text "5V0" at 0.953,18.094 h0.85 r270
  text "3V3" at 3.493,18.094 h0.85 r270
  text "nRF52832_MCU_Board" at 50.3,15.995 h1.7
  text "CR1632" at 20.984,6.213 h0.85
  text "5V0" at 0.698,2.54 h0.85 r270
  text "3V3" at 3.258,2.54 h0.85 r270
  text "GND" at 5.818,2.54 h0.85 r270
  text "09" at 10.878,2.54 h0.85 r270
  text "10" at 13.418,2.54 h0.85 r270
  text "11" at 15.958,2.54 h0.85 r270
  text "12" at 18.498,2.54 h0.85 r270
  text "13" at 21.038,2.54 h0.85 r270
  text "14" at 23.578,2.54 h0.85 r270
  text "15" at 26.118,2.54 h0.85 r270
  text "16" at 28.658,2.54 h0.85 r270
  text "17" at 31.198,2.54 h0.85 r270
  text "18" at 33.738,2.54 h0.85 r270
  text "19" at 36.278,2.54 h0.85 r270
  text "20" at 38.818,2.54 h0.85 r270
  text "21" at 41.358,2.54 h0.85 r270
  text "22" at 43.898,2.54 h0.85 r270
  text "23" at 46.438,2.54 h0.85 r270
  text "24" at 48.978,2.54 h0.85 r270
Unrouted:
  lines w0: 15.475,8 17.7,9.9